# EAGLE board Oven Control (EAGLE 9.3.0)
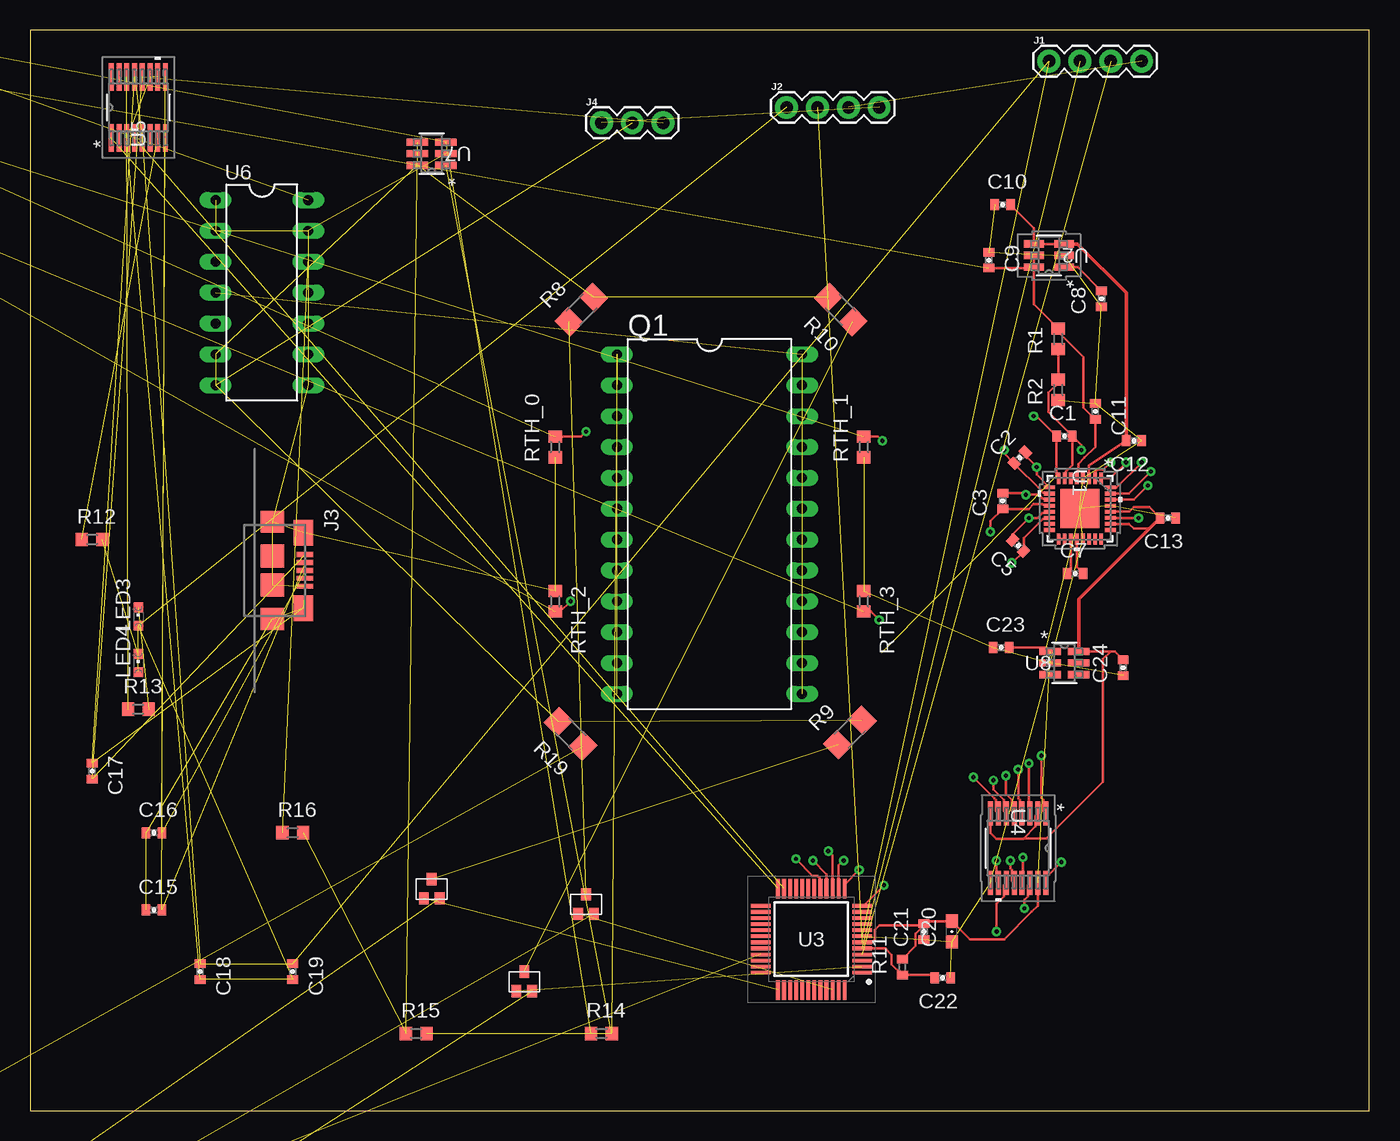
[diagram p0: board, top side]
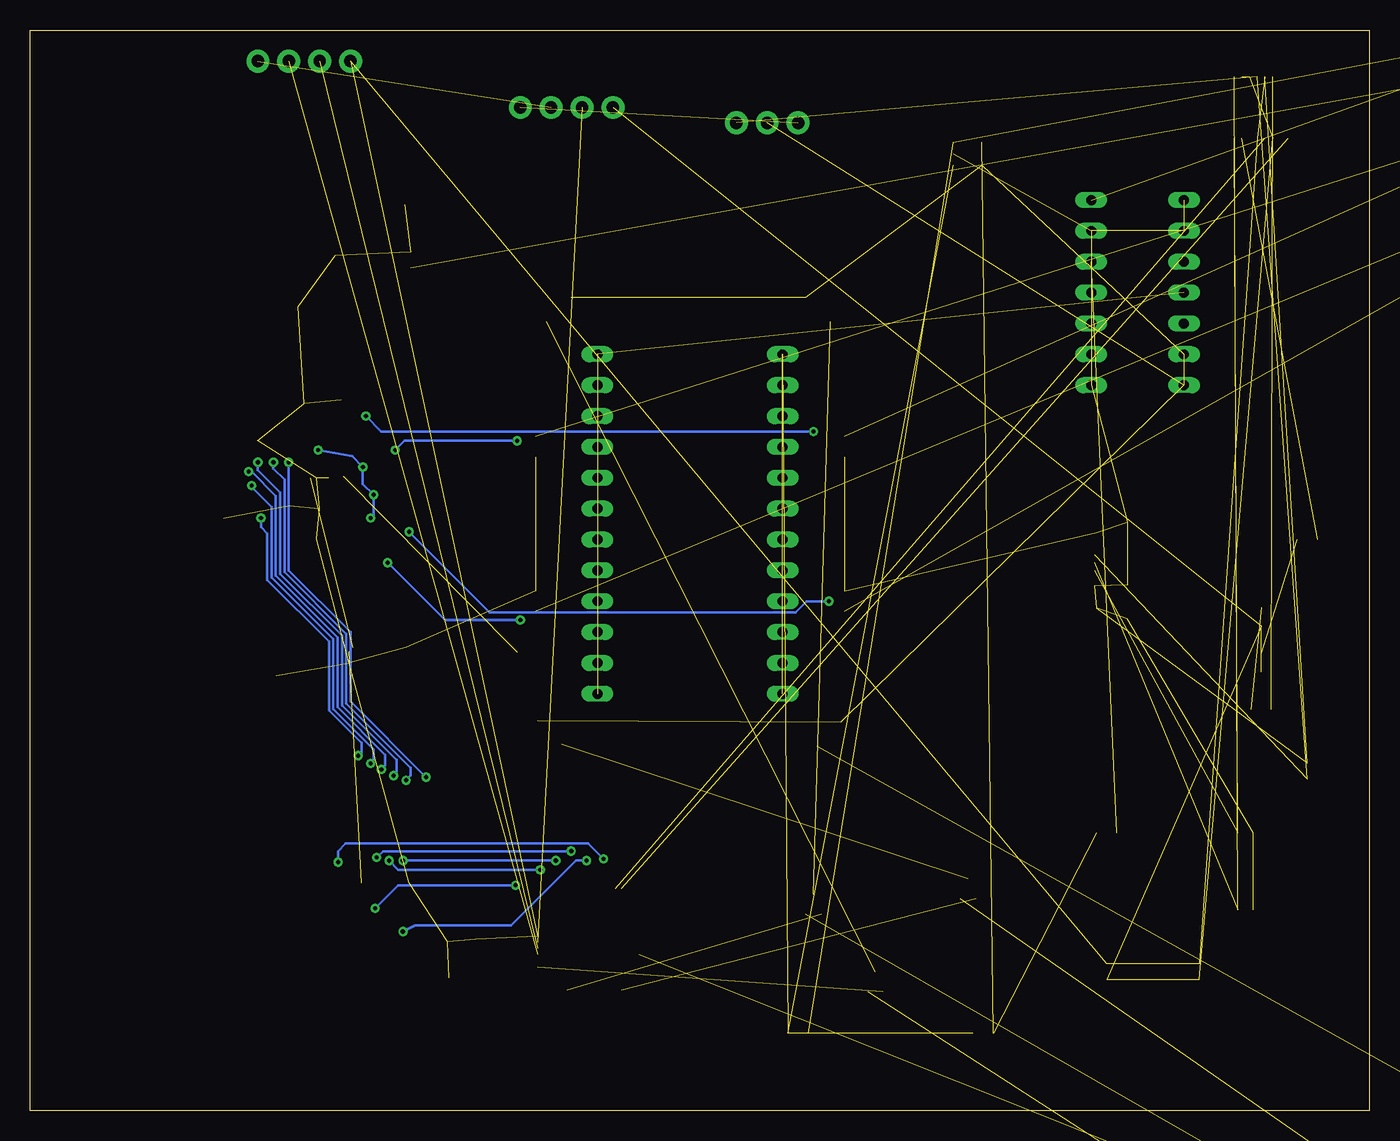
[diagram p1: board, bottom side, seen from below]

Size 110.16 x 88.89 mm. Coordinates in mm from the lower left corner, seen from the top.
Outline: 0,0 110.16,0 110.16,88.89 0,88.89 0,0
Copper layers (1*16): Top 0.035mm / dielectric 1.5mm / Bottom 0.035mm
Design rules "default": minimum track width 6mil, minimum drill 0.35mm, track to track 6mil, track to pad 6mil, pad to pad 6mil, via to via 6mil, smd to smd 6mil, copper to edge 40mil, drill to drill 6mil, minimum pad ring 10mil, minimum via ring 8mil, stop-mask expansion 4mil, vias tented up to drill 0mil, thermal gap 10mil

## Footprints (pad centres in the part's own frame; a part is rotated, then mirrored left to right if it is on the bottom)
0402-CAP = smd 0.7 x 0.9: 1 -0.65,0; 2 0.65,0
0603-CAP = smd 1.1 x 1: 1 -0.85,0; 2 0.85,0
1X04 = drill 1.016 pad 1.88: 1 0,0; 2 2.54,0; 3 5.08,0; 4 7.62,0
USB-MICRO-AB = smd 0.4 x 1.35: P$1 -1.3,1; P$2 -0.65,1; P$3 0,1; P$4 0.65,1; P$5 1.3,1 | smd 2.1 x 1.6: P$6 -3.1,0.875; P$7 3.1,0.875 | smd 1.8 x 1.9: P$8 -4,-1.675; P$9 4,-1.675 | smd 1.9 x 1.9: P$10 -1.2,-1.675; P$11 1.2,-1.675
1X03 = drill 1.016 pad 1.88: 1 0,0; 2 2.54,0; 3 5.08,0
CHIPLED_0603 = smd 0.8 x 0.8: A 0,-0.75; C 0,0.75
SOT-323 = smd 0.8 x 1: D 0,0; G -0.65,-1.6; S 0.65,-1.6
DIL24 = drill 0.813 long: 1 -13.97,-7.62; 2 -11.43,-7.62; 3 -8.89,-7.62; 4 -6.35,-7.62; 5 -3.81,-7.62; 6 -1.27,-7.62; 7 1.27,-7.62; 8 3.81,-7.62; 9 6.35,-7.62; 10 8.89,-7.62; 11 11.43,-7.62; 12 13.97,-7.62; 13 13.97,7.62; 14 11.43,7.62; 15 8.89,7.62; 16 6.35,7.62; 17 3.81,7.62; 18 1.27,7.62; 19 -1.27,7.62; 20 -3.81,7.62; 21 -6.35,7.62; 22 -8.89,7.62; 23 -11.43,7.62; 24 -13.97,7.62
R0603 = smd 1 x 1.1: 1 -0.85,0; 2 0.85,0
R1206 = smd 1.6 x 1.803: 1 -1.422,0; 2 1.422,0
R0402 = smd 0.7 x 0.9: 1 -0.65,0; 2 0.65,0
21-0140L_T3255-4-M = smd 0.914 x 0.305: 1 -2.502,1.75; 2 -2.502,1.25; 3 -2.502,0.75; 4 -2.502,0.25; 5 -2.502,-0.25; 6 -2.502,-0.75; 7 -2.502,-1.25; 8 -2.502,-1.75; 17 2.502,-1.75; 18 2.502,-1.25; 19 2.502,-0.75; 20 2.502,-0.25; 21 2.502,0.25; 22 2.502,0.75; 23 2.502,1.25; 24 2.502,1.75 | smd 0.305 x 0.914: 9 -1.75,-2.502; 10 -1.25,-2.502; 11 -0.75,-2.502; 12 -0.25,-2.502; 13 0.25,-2.502; 14 0.75,-2.502; 15 1.25,-2.502; 16 1.75,-2.502; 25 1.75,2.502; 26 1.25,2.502; 27 0.75,2.502; 28 0.25,2.502; 29 -0.25,2.502; 30 -0.75,2.502; 31 -1.25,2.502; 32 -1.75,2.502 | smd 3.2 x 3.2: 33 0,0
21-0058I-M = smd 1.626 x 0.61: 1 -1.245,0.95; 2 -1.245,0; 3 -1.245,-0.95; 4 1.245,-0.95; 5 1.245,0; 6 1.245,0.95
QFP50P900X900X145-48N = smd 1.6 x 0.3: 1 -4.175,2.75; 2 -4.175,2.25; 3 -4.175,1.75; 4 -4.175,1.25; 5 -4.175,0.75; 6 -4.175,0.25; 7 -4.175,-0.25; 8 -4.175,-0.75; 9 -4.175,-1.25; 10 -4.175,-1.75; 11 -4.175,-2.25; 12 -4.175,-2.75; 25 4.175,-2.75; 26 4.175,-2.25; 27 4.175,-1.75; 28 4.175,-1.25; 29 4.175,-0.75; 30 4.175,-0.25; 31 4.175,0.25; 32 4.175,0.75; 33 4.175,1.25; 34 4.175,1.75; 35 4.175,2.25; 36 4.175,2.75 | smd 0.3 x 1.6: 13 -2.75,-4.175; 14 -2.25,-4.175; 15 -1.75,-4.175; 16 -1.25,-4.175; 17 -0.75,-4.175; 18 -0.25,-4.175; 19 0.25,-4.175; 20 0.75,-4.175; 21 1.25,-4.175; 22 1.75,-4.175; 23 2.25,-4.175; 24 2.75,-4.175; 37 2.75,4.175; 38 2.25,4.175; 39 1.75,4.175; 40 1.25,4.175; 41 0.75,4.175; 42 0.25,4.175; 43 -0.25,4.175; 44 -0.75,4.175; 45 -1.25,4.175; 46 -1.75,4.175; 47 -2.25,4.175; 48 -2.75,4.175
PW16-M = smd 1.981 x 0.406: 1 -2.87,2.275; 2 -2.87,1.625; 3 -2.87,0.975; 4 -2.87,0.325; 5 -2.87,-0.325; 6 -2.87,-0.975; 7 -2.87,-1.625; 8 -2.87,-2.275; 9 2.87,-2.275; 10 2.87,-1.625; 11 2.87,-0.975; 12 2.87,-0.325; 13 2.87,0.325; 14 2.87,0.975; 15 2.87,1.625; 16 2.87,2.275
SSOP-16-M = smd 2.286 x 0.406: 1 -2.515,2.223; 2 -2.515,1.587; 3 -2.515,0.953; 4 -2.515,0.318; 5 -2.515,-0.318; 6 -2.515,-0.953; 7 -2.515,-1.587; 8 -2.515,-2.223; 9 2.515,-2.223; 10 2.515,-1.587; 11 2.515,-0.953; 12 2.515,-0.318; 13 2.515,0.318; 14 2.515,0.953; 15 2.515,1.587; 16 2.515,2.223
DIL14 = drill 0.813 long: 1 -7.62,-3.81; 2 -5.08,-3.81; 3 -2.54,-3.81; 4 0,-3.81; 5 2.54,-3.81; 6 5.08,-3.81; 7 7.62,-3.81; 8 7.62,3.81; 9 5.08,3.81; 10 2.54,3.81; 11 0,3.81; 12 -2.54,3.81; 13 -5.08,3.81; 14 -7.62,3.81
DBV6-M = smd 1.778 x 0.61: 1 -1.168,0.95; 2 -1.168,0; 3 -1.168,-0.95; 4 1.168,-0.95; 5 1.168,0; 6 1.168,0.95

## Placement (x,y rotation side)
C1  1nF  [0402-CAP]  85.09,55.5 0 top
C2  1nF  [0402-CAP]  81.41,53.72 45 top
C3  1nF  [0402-CAP]  80.01,50.16 90 top
C5  1nF  [0402-CAP]  81.28,46.48 135 top
C7  1nF  [0402-CAP]  85.98,44.2 0 top
C8  .1uF  [0402-CAP]  88.14,66.8 90 top
C9  .1uF  [0402-CAP]  78.87,69.98 270 top
C10  .1uF  [0402-CAP]  80.01,74.55 0 top
C11  10nF  [0402-CAP]  87.63,57.53 270 top
C12  1uF  [0402-CAP]  90.81,55.12 180 top
C13  1uF  [0402-CAP]  93.6,48.77 180 top
C15  47pF  [0402-CAP]  10.16,16.51 0 top
C16  47pF  [0402-CAP]  10.16,22.86 0 top
C17  100nF  [0402-CAP]  5.08,27.94 270 top
C18  4.7uF  [0402-CAP]  13.97,11.43 270 top
C19  100nF  [0402-CAP]  21.59,11.43 270 top
C20  10uF  [0603-CAP]  75.82,14.73 90 top
C21  .1uF  [0402-CAP]  73.53,14.73 90 top
C22  1nF  [0402-CAP]  75.06,10.92 180 top
C23  1uF  [0402-CAP]  79.88,38.1 0 top
C24  1uF  [0402-CAP]  89.92,36.45 90 top
J1  [1X04]  83.82,86.36 0 top
J2  [1X04]  62.23,82.55 0 top
J3  USB-OTGMICRO-AB  [USB-MICRO-AB]  21.59,44.45 270 top
J4  455-1750-1-ND  [1X03]  46.99,81.28 0 top
LED3  D2  [CHIPLED_0603]  8.89,40.64 0 top
LED4  D1  [CHIPLED_0603]  8.89,36.83 0 top
M1  BSS816NW  [SOT-323]  45.72,17.78 0 top
M2  BSS816NW  [SOT-323]  33.02,19.05 0 top
M3  BSS816NW  [SOT-323]  40.64,11.43 0 top
M4  BSS816NW  [SOT-323]  -90.17,-45.72 0 top  (outside the outline)
Q1  MEMS_RESONATOR  [DIL24]  55.88,48.26 270 top
R1  30k  [R0603]  84.58,63.5 90 top
R2  30k  [R0603]  84.58,59.31 90 top
R3  30k  [R0603]  -30.48,88.9 0 top  (outside the outline)
R4  30k  [R0603]  -35.56,88.9 0 top  (outside the outline)
R5  30k  [R0603]  -40.64,88.9 0 top  (outside the outline)
R6  30k  [R0603]  -45.72,88.9 0 top  (outside the outline)
R8  [R1206]  45.34,65.91 45 top
R9  [R1206]  67.44,31.11 45 top
R10  [R1206]  66.67,65.91 135 top
R11  47k  [R0402]  71.75,11.81 90 top
R12  270R  [R0603]  5.08,46.99 0 top
R13  270R  [R0603]  8.89,33.02 0 top
R14  21k  [R0603]  46.99,6.35 0 top
R15  21k  [R0603]  31.75,6.35 0 top
R16  21k  [R0603]  21.59,22.86 0 top
R17  21k  [R0603]  -15.24,88.9 0 top  (outside the outline)
R19  [R1206]  44.45,30.99 135 top
R20  >VALUE  [R0603]  -88.9,-60.96 0 top  (outside the outline)
R21  >VALUE  [R0603]  -88.9,-67.31 0 top  (outside the outline)
R22  >VALUE  [R0603]  -88.9,-73.66 0 top  (outside the outline)
R23  >VALUE  [R0603]  -88.9,-80.01 0 top  (outside the outline)
RTH_0  47k  [R0603]  43.18,54.61 90 top
RTH_1  47k  [R0603]  68.58,54.61 90 top
RTH_2  47k  [R0603]  43.18,41.91 270 top
RTH_3  47k  [R0603]  68.58,41.91 270 top
U1  MAX11254ATJ+21-0140L_T3255-4-M  [21-0140L_T3255-4-M]  86.36,49.53 270 top
U2  MAX6070AAUT25+T21-0058I-M  [21-0058I-M]  83.82,70.36 180 top
U3  MSP430FR2355TPT  [QFP50P900X900X145-48N]  64.26,14.1 180 top
U4  TXB0106PWRPW16-M  [PW16-M]  81.28,21.59 270 top
U5  FT230XSSSOP-16-M  [SSOP-16-M]  8.89,82.55 90 top
U6  NE5211  [DIL14]  19.05,67.31 270 top
U7  OPA322AIDBVRDBV6-M  [DBV6-M]  33.02,78.74 180 top
U8  MIC5504  [DBV6-M]  85.09,36.83 0 top

## Library data of the parts
C1-C3 C5 C7-C13 C15-C24 = pie; PIE-INT-REF-NUM: CAPACITOR-GENERIC
J1 J2 = SparkFun-Connectors; PROD_ID: CONN-09696
J3 = pie; PIE-DIGIKEY-PN-PRI: H11635CT-ND; PIE-INT-REF-NUM: USB
J4 = SparkFun-Connectors; PROD_ID: XXX-00000
LED3 LED4 = adafruit
M1-M4 Q1 U6 U8 = Oven Control Lib
R1-R6 R12-R17 R20-R23 RTH_0 RTH_1-RTH_3 = pie; DESCRIPTION: RESISTOR, American symbol; DISTRIBUTOR: DigiKey; MANUFACTURER: Rohm Semiconductor; NOTES: Cut Tape; PACKAGE: R0603
R8-R11 R19 = pie; PIE-INT-REF-NUM: RESISTOR-GENERIC
U1 = Oven Control Lib; MANUFACTURER_PART_NUMBER: MAX11254ATJ+; VENDOR: Maxim Integrated Products
U2 = Oven Control Lib; MANUFACTURER_PART_NUMBER: MAX6070AAUT25+T; VENDOR: Maxim Integrated Products
U3 = Oven Control Lib; DESCRIPTION: 16-bit Microcontrollers - MCU 24MHz 105C ULP Microcontroller With 32 KB FRAM, 4 KB SRAM, 44 IO, 12-bit ADC, 12-bit DACs, OpAmp/PGA 48-LQFP -40 to 105; HEIGHT: 1.45mm; MANUFACTURER_NAME: Texas Instruments; MANUFACTURER_PART_NUMBER: MSP430FR2355TPT
U4 = Oven Control Lib; MANUFACTURER_PART_NUMBER: TXB0106PWR; VENDOR: Texas Instruments
U5 = Oven Control Lib; MANUFACTURER_PART_NUMBER: FT230XS; VENDOR: FTDI Future Technology Devices International Ltd
U7 = Oven Control Lib; MANUFACTURER_PART_NUMBER: OPA322AIDBVR; VENDOR: Texas Instruments

## Nets
1.8V: C13.2 C24.2 U1.26 U1.28 U4.2 U4.8 U8.6
2.5V_REF: C9.2 C11.2 R1.2 R3.2 R4.2 R5.2 R6.2 U1.5 U2.5 U2.6
3.3V: C10.2 C12.2 C20.2 C21.2 C23.2 J2.2 R11.2 U1.3 U2.3 U2.4 U3.6 U4.15 U8.1
3.3V_SBW: J1.4 J2.3
3.3V_USB: C18.2 C19.2 J2.1 LED3.A LED4.A U5.3 U5.10 U5.11
5V: J4.2 R8.2 R9.2 R10.2 R19.2 U6.6 U6.7 U7.6
5V_USB: C17.2 J3.P$1 J4.3 U5.12
AIN_N: C1.2 C2.2 C3.2 C5.2 R1.1 R2.2 U1.7 U1.9 U1.11 U1.13
AINP_0: C1.1 R3.1 RTH_0.2 U1.8
AINP_1: C2.1 R4.1 RTH_1.2 U1.10
AINP_2: C3.1 R5.1 RTH_2.2 U1.12
AINP_3: C5.1 R6.1 RTH_3.2 U1.14
CSB: U1.31 U4.4
CSB_B: U3.15 U4.13
D+: C16.2 J3.P$3 U5.8
D-: C15.2 J3.P$2 U5.9
DIN: U1.32 U4.5
DIN_B: U3.13 U4.12
DOUT: U1.30 U4.3
DOUT_B: U3.12 U4.14
GND: C8.1 C9.1 C10.1 C11.1 C12.1 C13.1 C15.1 C16.1 C17.1 C18.1 C19.1 C20.1 C21.1 C22.1 C23.1 C24.1 J1.1 J3.P$5 J3.P$6 J3.P$7 J3.P$8 J3.P$9 J3.P$10 J3.P$11 R2.1 RTH_0.1 RTH_1.1 RTH_2.1 RTH_3.1 U1.4 U1.6 U1.21 U1.29 U1.33 U2.2 U3.7 U4.9 U5.5 U5.13 U6.1 U6.2 U6.8 U6.9 U6.10 U6.11 U6.13 U7.2 U8.2
MSP_RX: U3.24 U5.1
MSP_TX: U3.23 U5.4
N$1: C7.2 U1.20
N$2: C7.1 U1.19
N$3: M1.D R8.1
N$4: R17.1 U6.14
N$5: M1.S R20.2
N$6: C8.2 U2.1
N$7: M2.D R9.1
N$9: R16.1 U6.12
N$10: R14.1 R17.2 U7.3
N$11: R15.1 R16.2 U7.4
N$12: Q1.1 Q1.2 Q1.3 Q1.4 Q1.5 Q1.6 Q1.7 Q1.8 Q1.9 Q1.10 Q1.11 Q1.12 R14.2 R15.2 U7.1
N$20: LED3.C R13.2
N$21: LED4.C R12.2
N$25: Q1.13 Q1.14 Q1.15 Q1.16 Q1.17 Q1.18 Q1.19 Q1.20 Q1.21 Q1.22 Q1.23 Q1.24 U6.4
N$28: M3.D R10.1
N$29: M4.D R19.1
N$30: M2.S R21.2
N$31: M3.S R22.2
N$32: M4.S R23.2
N$33: R20.1 R21.1 R22.1 R23.1
N$34: U1.17 U1.18
N$35: U1.15 U1.16
NC: J2.4 J4.1
RDYB: U1.1 U4.6
RDYB_B: U3.16 U4.11
RSTB: U1.27 U4.1
RSTB_B: U3.17 U4.16
RX#1: R13.1 U5.14
SBW_RST: C22.2 J1.2 R11.1 U3.5
SBW_TEST: J1.3 U3.4
SCLK: U1.2 U4.7
SCLK_B: U3.14 U4.10
TCTRL_0: M1.G U3.46
TCTRL_1: M2.G U3.37
TCTRL_2: M3.G U3.2
TCTRL_3: M4.G U3.33
TX#1: R12.1 U5.7
VFB_0: U3.45
VFB_1: U3.36
VFB_2: U3.1
VFB_3: U3.32

## Tracks (layer width: path | path; a pad name or v marks a point on that pad's centre or on a via)
1.8V
  Top 0.203: 88.9,37.78 89.23,37.78 C24.2 | 88.9,37.78 U8.6 | U1.28 90.43,49.28 90.81,49.66 92.06,49.66 C13.2 92.58,48.4 92.06,47.88 90.81,47.88 90.4,48.28 U1.26 | U4.8 79,22.85 79.5,22.35 81.7,22.35 81.74,22.4 | U4.2 82.71,24.27 82.71,23.36 81.74,22.4 | 81.74,22.4 83.61,22.4 88.27,27.05 88.27,37.15 88.9,37.78
  Top 0.305: U8.6 86.26,42.08 92.58,48.4
2.5V_REF  (4 unrouted)
  Top 0.203: U2.5 U2.6 | U1.5 86.2,52.13 86.2,52.59 86.23,52.62 86.23,53.21 86.74,53.72 86.75,53.72 87.63,54.61 C11.2 86.66,57.85 86.66,61.98 84.58,64.06 R1.2 82.58,66.36 U2.6 | C9.2 82.49,69.33 U2.6
3.3V  (3 unrouted)
  Top 0.203: U2.3 U2.4 82.58,72.63 C10.2 | U1.3 87.11,53.09 89.93,54.97 C12.2 | C23.2 83.6,38.1 U8.1 | U4.15 82.91,16.86 82.42,16.38 80.14,14.1 78.11,14.1 77.3,14.1 C20.2 73.73,15.58 C21.2 | U3.6 69.25,13.85 69.49,14.09 69.49,14.88 69.85,15.24 73.39,15.24 C21.2 | C21.2 73.53,15.24 72.83,14.54 72.83,13.54 R11.2
  Top 0.305: U2.3 86.17,71.31 90.17,67.31 90.17,55.21 89.93,54.97
3.3V_SBW  (1 unrouted)
3.3V_USB  (7 unrouted)
5V  (7 unrouted)
5V_USB  (3 unrouted)
AIN_N  (via drill 0.35)
  Top 0.203: R1.1 R2.2 84.58,59.87 83.78,59.06 83.78,57.46 C1.2 | 85.09,52.05 U1.7 85.2,52.13 85.2,52.59 85.74,53.13 C1.2 | C1.2 85.74,54.59 | U1.9 82.8,52.33 v82.8,52.96 81.87,53.9 C2.2 | U1.11 83.76,50.37 83.29,50.37 82.99,50.67 v81.92,50.67 81.77,50.81 C3.2 | U1.13 83.76,49.19 83.29,49.19 82.87,48.77 v82.17,48.77 80.82,47.42 C5.2 | v86.49,54.36 86.49,54.75 C1.2
  Bottom 0.203: v86.49,54.36 83.69,53.85 v82.8,52.96 82.8,51.56 v81.92,50.67 81.92,49.02 v82.17,48.77
AINP_0  (via drill 0.35)  (3 unrouted)
  Top 0.203: RTH_0.2 45.3,55.46 v45.72,55.88 | v82.55,57.15 82.79,57.15 C1.1 84.44,52.2 U1.8
  Bottom 0.203: v45.72,55.88 81.28,55.88 v82.55,57.15
AINP_1  (via drill 0.35)  (1 unrouted)
  Top 0.203: U1.10 83.76,50.87 83.3,50.87 83.15,51.02 83.15,51.06 C2.1 80.14,54.07 v80.14,54.36 | RTH_1.2 69.76,55.46 v70.1,55.12
  Bottom 0.203: v70.1,55.12 79.38,55.12 v80.14,54.36
AINP_2  (via drill 0.35)  (1 unrouted)
  Top 0.203: v78.99,47.62 78.99,48.5 C3.1 82.15,49.52 82.55,49.91 83.26,49.91 83.3,49.87 83.76,49.87 U1.12 83.76,49.69 | RTH_2.2 43.6,41.06 v44.45,41.91
  Bottom 0.203: v44.45,41.91 46.31,41.91 47.22,41 72.36,41 v78.99,47.62
AINP_3  (via drill 0.35)  (1 unrouted)
  Top 0.203: U1.14 83.76,48.69 83.3,48.69 81.74,47.13 C5.1 80.8,45.09 v80.77,45.09 | RTH_3.2 69.15,41.06 v69.85,40.36
  Bottom 0.203: v69.85,40.36 76.05,40.36 v80.77,45.09
CSB  (via drill 0.35)
  Top 0.2: U1.31 90.4,50.78 v92.2,52.58 | v81.28,28.07 81.28,25.69 81.41,25.55 81.41,24.66 U4.4
  Bottom 0.2: v92.2,52.58 91.95,52.58 89.96,50.59 89.96,44.01 84.89,38.94 84.89,33.22 80.95,29.28 80.95,28.39 v81.28,28.07
CSB_B  (via drill 0.35)
  Top 0.2: U3.15 66.01,20.99 v65.66,21.34 | v81.66,20.83 81.66,18.78 U4.13
  Bottom 0.2: v65.66,21.34 81.15,21.34 v81.66,20.83
D+  (2 unrouted)
D-  (2 unrouted)
DIN  (via drill 0.35)
  Top 0.2: U1.32 89.38,51.28 v91.44,53.34 | U4.5 80.76,24.66 80.76,25.55 80.26,26.05 v80.26,27.56
  Bottom 0.2: v91.44,53.34 91.44,52.7 89.61,50.87 89.61,44.16 84.53,39.08 84.53,33.35 80,28.83 80,27.82 v80.26,27.56
DIN_B  (via drill 0.35)
  Top 0.2: U3.13 67.01,18.62 v68.2,19.81 | v80.64,20.57 80.64,19.93 80.76,19.82 80.76,18.91 U4.12
  Bottom 0.2: v68.2,19.81 79.88,19.81 v80.64,20.57
DOUT  (via drill 0.35)
  Top 0.2: U1.30 90.8,50.28 v91.95,51.43 | v82.17,28.57 82.17,24.55 U4.3
  Bottom 0.2: v91.95,51.43 91.95,51.31 90.31,49.67 90.31,43.87 85.24,38.79 85.24,33.07 81.9,29.73 81.9,28.84 v82.17,28.57
DOUT_B  (via drill 0.35)
  Top 0.2: U3.12 68.54,16.85 v70.23,18.54 | U4.14 82.06,18.52 82.06,17.62 81.79,17.35 v81.79,16.64
  Bottom 0.2: v70.23,18.54 79.88,18.54 v81.79,16.64
GND  (47 unrouted)
MSP_RX  (1 unrouted)
MSP_TX  (1 unrouted)
N$1
  Top 0.203: U1.20 86.11,44.72 C7.2
N$2
  Top 0.203: U1.19 85.61,44.48 C7.1
N$3  (1 unrouted)
N$4  (1 unrouted)
N$5  (1 unrouted)
N$6
  Top 0.203: U2.1 86.18,69.41 C8.2
N$7  (1 unrouted)
N$9  (1 unrouted)
N$10  (2 unrouted)
N$11  (2 unrouted)
N$12  (14 unrouted)
N$20  (1 unrouted)
N$21  (1 unrouted)
N$25  (12 unrouted)
N$28  (1 unrouted)
N$29  (1 unrouted)
N$30  (1 unrouted)
N$31  (1 unrouted)
N$32  (1 unrouted)
N$33  (3 unrouted)
N$34
  Top 0.203: U1.17 U1.18
N$35
  Top 0.203: U1.15 U1.16
NC  (1 unrouted)
RDYB  (via drill 0.35)
  Top 0.2: U1.1 88.86,52.03 v90.17,53.34 | U4.6 80.11,24.66 80.11,25.55 79.25,26.42 v79.25,27.18
  Bottom 0.2: v90.17,53.34 90.17,52.83 89.25,51.91 89.25,44.3 84.17,39.22 84.17,33.5 78.87,28.19 78.87,27.56 v79.25,27.18
RDYB_B  (via drill 0.35)
  Top 0.2: U3.16 65.51,19.45 v64.39,20.57 | U4.11 80.11,18.52 80.11,17.62 79.5,17.02 v79.5,14.73
  Bottom 0.2: v64.39,20.57 65.28,20.57 70.61,15.24 78.49,15.24 v79.5,14.73
RSTB  (via drill 0.35)
  Top 0.2: U1.27 91.17,48.78 v91.19,48.77 | U4.1 83.36,24.66 83.36,25.55 83.19,25.73 v83.19,29.21
  Bottom 0.2: v91.19,48.77 91.19,48.01 90.66,47.48 90.66,43.67 85.59,38.6 85.59,32.92 82.91,30.25 82.91,29.48 v83.19,29.21
RSTB_B  (via drill 0.35)
  Top 0.2: U4.16 83.56,19.17 v84.84,20.45 | U3.17 64.91,18.37 64.91,19.18 64.77,19.32 64.37,19.32 v62.99,20.7
  Bottom 0.2: v84.84,20.45 84.84,21.34 84.2,21.97 64.26,21.97 v62.99,20.7
RX#1  (1 unrouted)
SBW_RST  (1 unrouted)
  Top 0.2: U3.5 70.35,13.35 70.87,12.83 70.87,12.05 R11.1 74.17,11.16 C22.2
SBW_TEST  (1 unrouted)
SCLK  (via drill 0.35)
  Top 0.2: v88.9,53.34 88.3,52.74 87.85,52.74 87.61,52.5 U1.2 | U4.7 79.46,24.66 79.46,25.55 79.31,25.7 v77.6,27.42 v77.6,27.43
  Bottom 0.2: v88.9,53.34 88.9,44.45 83.82,39.37 83.82,33.66 v77.6,27.43
SCLK_B  (via drill 0.35)
  Top 0.2: U3.14 66.51,20.16 v66.93,20.57 | v79.5,20.57 79.5,18.87 U4.10
  Bottom 0.2: v66.93,20.57 v79.5,20.57
TCTRL_0  (1 unrouted)
TCTRL_1  (1 unrouted)
TCTRL_2  (1 unrouted)
TCTRL_3  (1 unrouted)
TX#1  (1 unrouted)